# EAGLE board PowerLED-Driver (EAGLE 6.3)
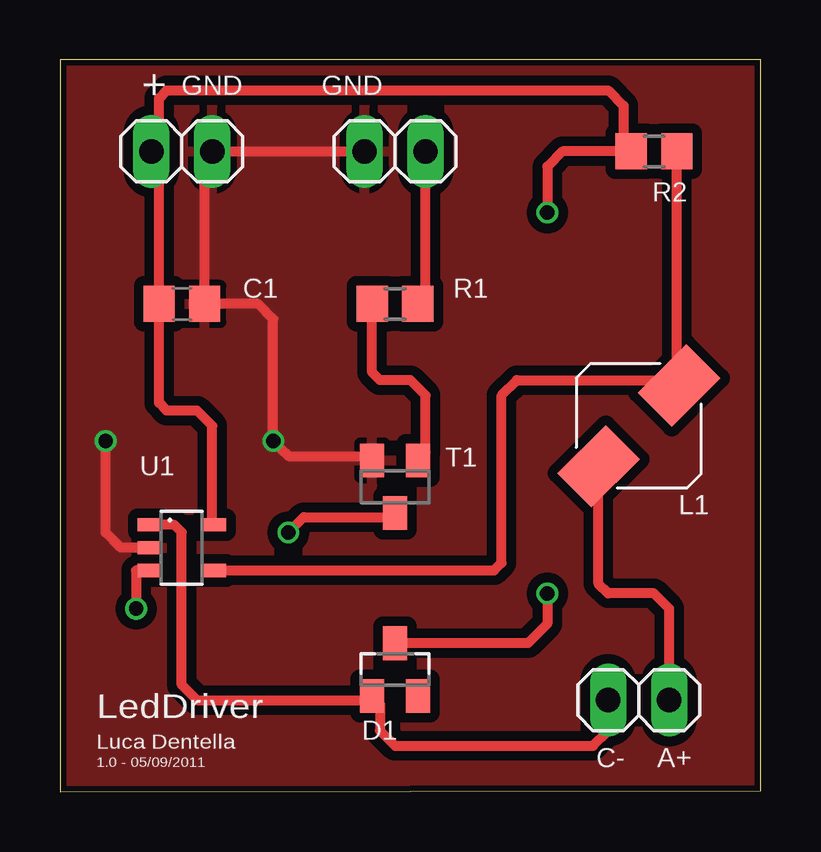
[diagram p0: board, top side]
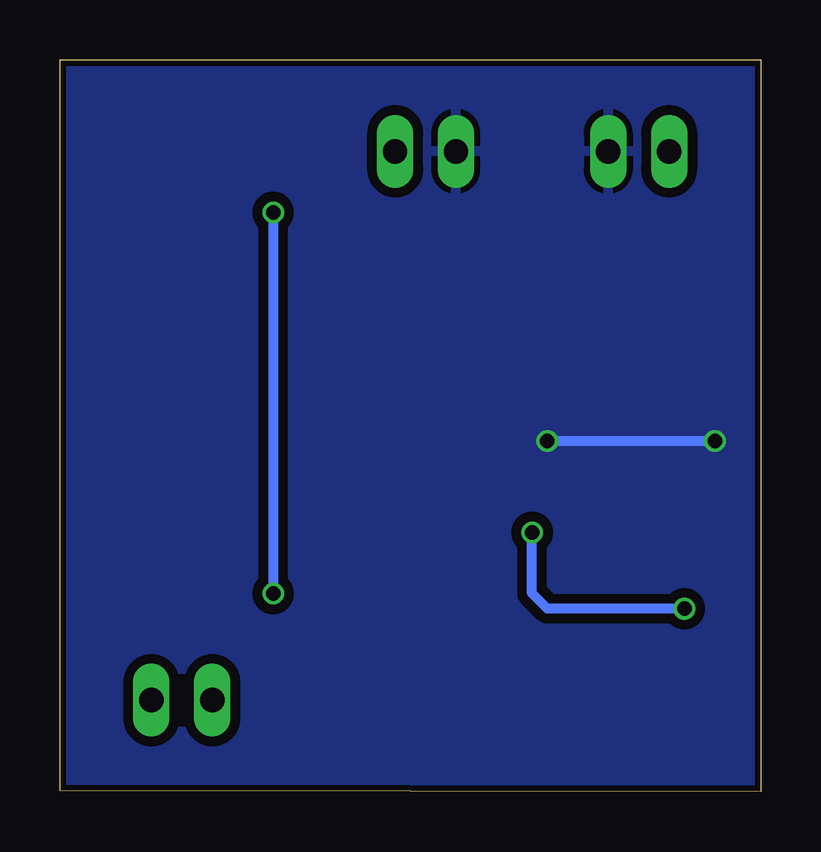
[diagram p1: board, bottom side, seen from below]

Size 29.21 x 30.48 mm. Coordinates in mm from the lower left corner, seen from the top.
Outline: 0,0 29.21,0.03 29.21,30.48 0,30.48 0,0
Copper layers (1*16): Top 0.035mm / dielectric 1.5mm / Bottom 0.035mm
Design rules "Fusion_eagle_rule_v1.1 *": minimum track width 6mil, minimum drill 12mil, track to track 16mil, track to pad 16mil, pad to pad 6mil, via to via 6mil, smd to smd 0mil, copper to edge 10mil, drill to drill 10mil, minimum pad ring 10mil, minimum via ring 6mil, stop-mask expansion 2mil, vias tented up to drill 100mil, thermal gap 10mil

## Footprints (pad centres in the part's own frame; a part is rotated, then mirrored left to right if it is on the bottom)
C0805 = smd 1.3 x 1.5: 1 -0.95,0; 2 0.95,0
DIODE_SOT23 = smd 1 x 1.4: 1 -0.95,-1.1; 2 0.95,-1.1; 3 0,1.1
1X02 = drill 1.016 long: 1 -1.27,0; 2 1.27,0
JENWILLY_CUSTOM_ELL5PS_INDUCTOR = smd 2.85 x 2 rotated 225: P$1 1.686,1.672; P$2 -1.672,-1.686
R0805 = smd 1.3 x 1.5: 1 -0.95,0; 2 0.95,0
SOT23 = smd 1 x 1.4: 1 -0.95,-1.1; 2 0.95,-1.1; 3 0,1.1
JENWILLY_CUSTOM_SOT23-5 = smd 0.55 x 1: 1 -0.95,-1.35; 2 0,-1.35; 3 0.95,-1.35; 4 0.95,1.35; 5 -0.95,1.35

## Placement (x,y rotation side)
C1  1uF  [C0805]  5.08,20.32 0 top
D1  ZLLS1000  [DIODE_SOT23]  13.97,5.08 0 top
JP1  IN  [1X02]  5.08,26.67 180 top
JP2  LED  [1X02]  24.13,3.81 180 top
JP3  CTRL  [1X02]  13.97,26.67 0 top
L1  68uH  [JENWILLY_CUSTOM_ELL5PS_INDUCTOR]  24.13,15.24 0 top
R1  3.3k  [R0805]  13.97,20.32 0 top
R2  0.33  [R0805]  24.77,26.67 180 top
T1  BC848  [SOT23]  13.97,12.7 180 top
U1  ZXLD1350  [JENWILLY_CUSTOM_SOT23-5]  5.08,10.16 270 top

## Library data of the parts
C1 R1 R2 = rcl
D1 L1 U1 = 2811
JP1-JP3 = pinhead
T1 = transistor

## Nets
+12V: C1.1 D1.3 JP1.2 R2.2 U1.5
GND: C1.2 JP1.1 JP3.1 T1.2 U1.2
N$1: JP3.2 R1.2
N$2: R1.1 T1.1
N$4: T1.3 U1.3
N$5: D1.1 JP2.2 U1.1
N$6: L1.P$1 R2.1 U1.4
N$7: JP2.1 L1.P$2

## Tracks (layer width: path | path; a pad name or v marks a point on that pad's centre or on a via)
+12V  (via drill 0.6)
  Top 0.406: 4.13,26.67 JP1.2 | 4.13,26.67 C1.1 4.13,16.19 4.45,15.88 5.71,15.88 6.35,15.24 6.35,11.19 U1.5 | 4.13,26.67 4.13,28.89 4.45,29.21 22.86,29.21 23.5,28.57 23.5,26.99 R2.2 20.95,26.67 20.32,26.04 v20.32,24.13 | D1.3 19.52,6.18 20.32,6.99 v20.32,8.26
  Bottom 0.406: v20.32,24.13 v20.32,8.26
GND  (via drill 0.6)
  Top 0.406: JP3.1 JP1.1 6.03,26.67 C1.2 8.26,20.32 8.89,19.68 v8.89,14.61 9.21,14.29 9.53,13.97 12.85,13.97 T1.2 | U1.2 2.54,10.16 1.91,10.79 v1.91,14.61
  Bottom 0.406: v1.91,14.61 v8.89,14.61
  pour Bottom: 0,30.48 28.96,30.48 29.21,30.23 29.21,0 0.25,0 0,0.25
  pour Top: 0,30.48 28.96,30.48 29.21,30.23 29.21,0 0.25,0 0,0.25
N$1
  Top 0.406: JP3.2 15.24,20.64 R1.2
N$2
  Top 0.406: R1.1 13.02,17.46 13.33,17.14 14.61,17.14 15.24,16.51 15.24,14.12 T1.1
N$4  (via drill 0.6)
  Top 0.406: U1.3 3.17,9.21 v3.17,7.62 | v9.53,10.79 10.16,11.43 13.8,11.43 T1.3
  Bottom 0.406: v3.17,7.62 8.89,7.62 9.53,8.26 v9.53,10.79
N$5
  Top 0.406: U1.1 4.77,11.11 5.08,10.79 5.08,4.45 5.71,3.81 12.85,3.81 D1.1 13.33,3.67 13.33,2.54 13.97,1.91 22.22,1.91 22.86,2.54 JP2.2
N$6
  Top 0.406: R2.1 25.71,17.01 L1.P$1 25.58,17.14 19.05,17.14 18.41,16.51 18.41,9.53 18.1,9.21 U1.4
N$7
  Top 0.406: L1.P$2 22.46,8.66 22.86,8.26 24.77,8.26 25.4,7.62 JP2.1

## Text on the board
tNames: + | GND | GND | LedDriver | Luca Dentella | 1.0 - 05/09/2011 | C- | A+